# Altium PCB care.PcbDoc
Units mm, origin at the board's own origin, x right, y up, seen from the top; angles counter-clockwise.
Board outline 40 x 35 mm, 2 copper layers (Top Layer, Bottom Layer); 39 components, 34 nets, 158 pads, 53 vias.
Unrouted connection lines stored in the file: 1.
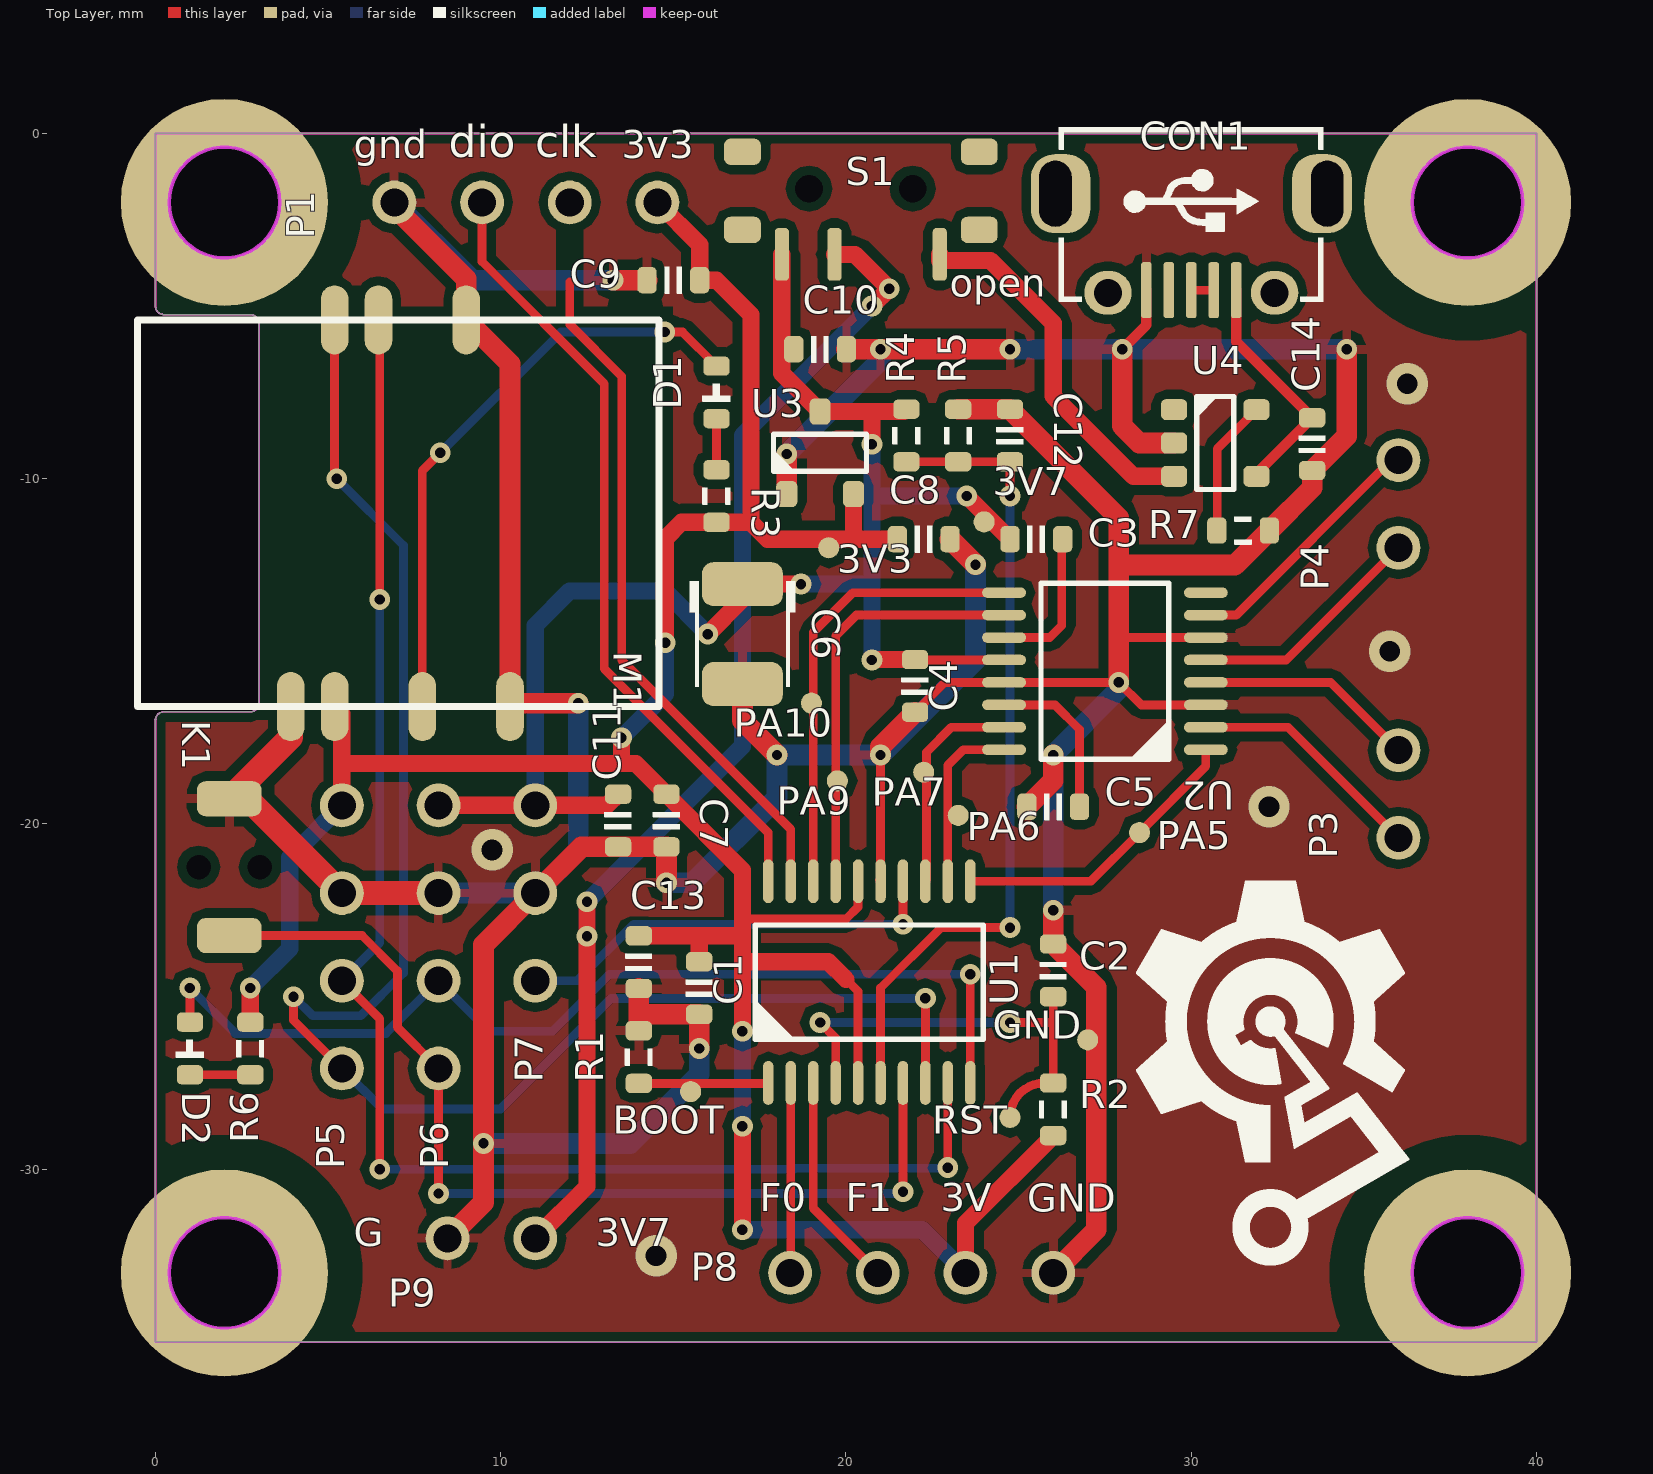
[diagram p0: Top Layer view]
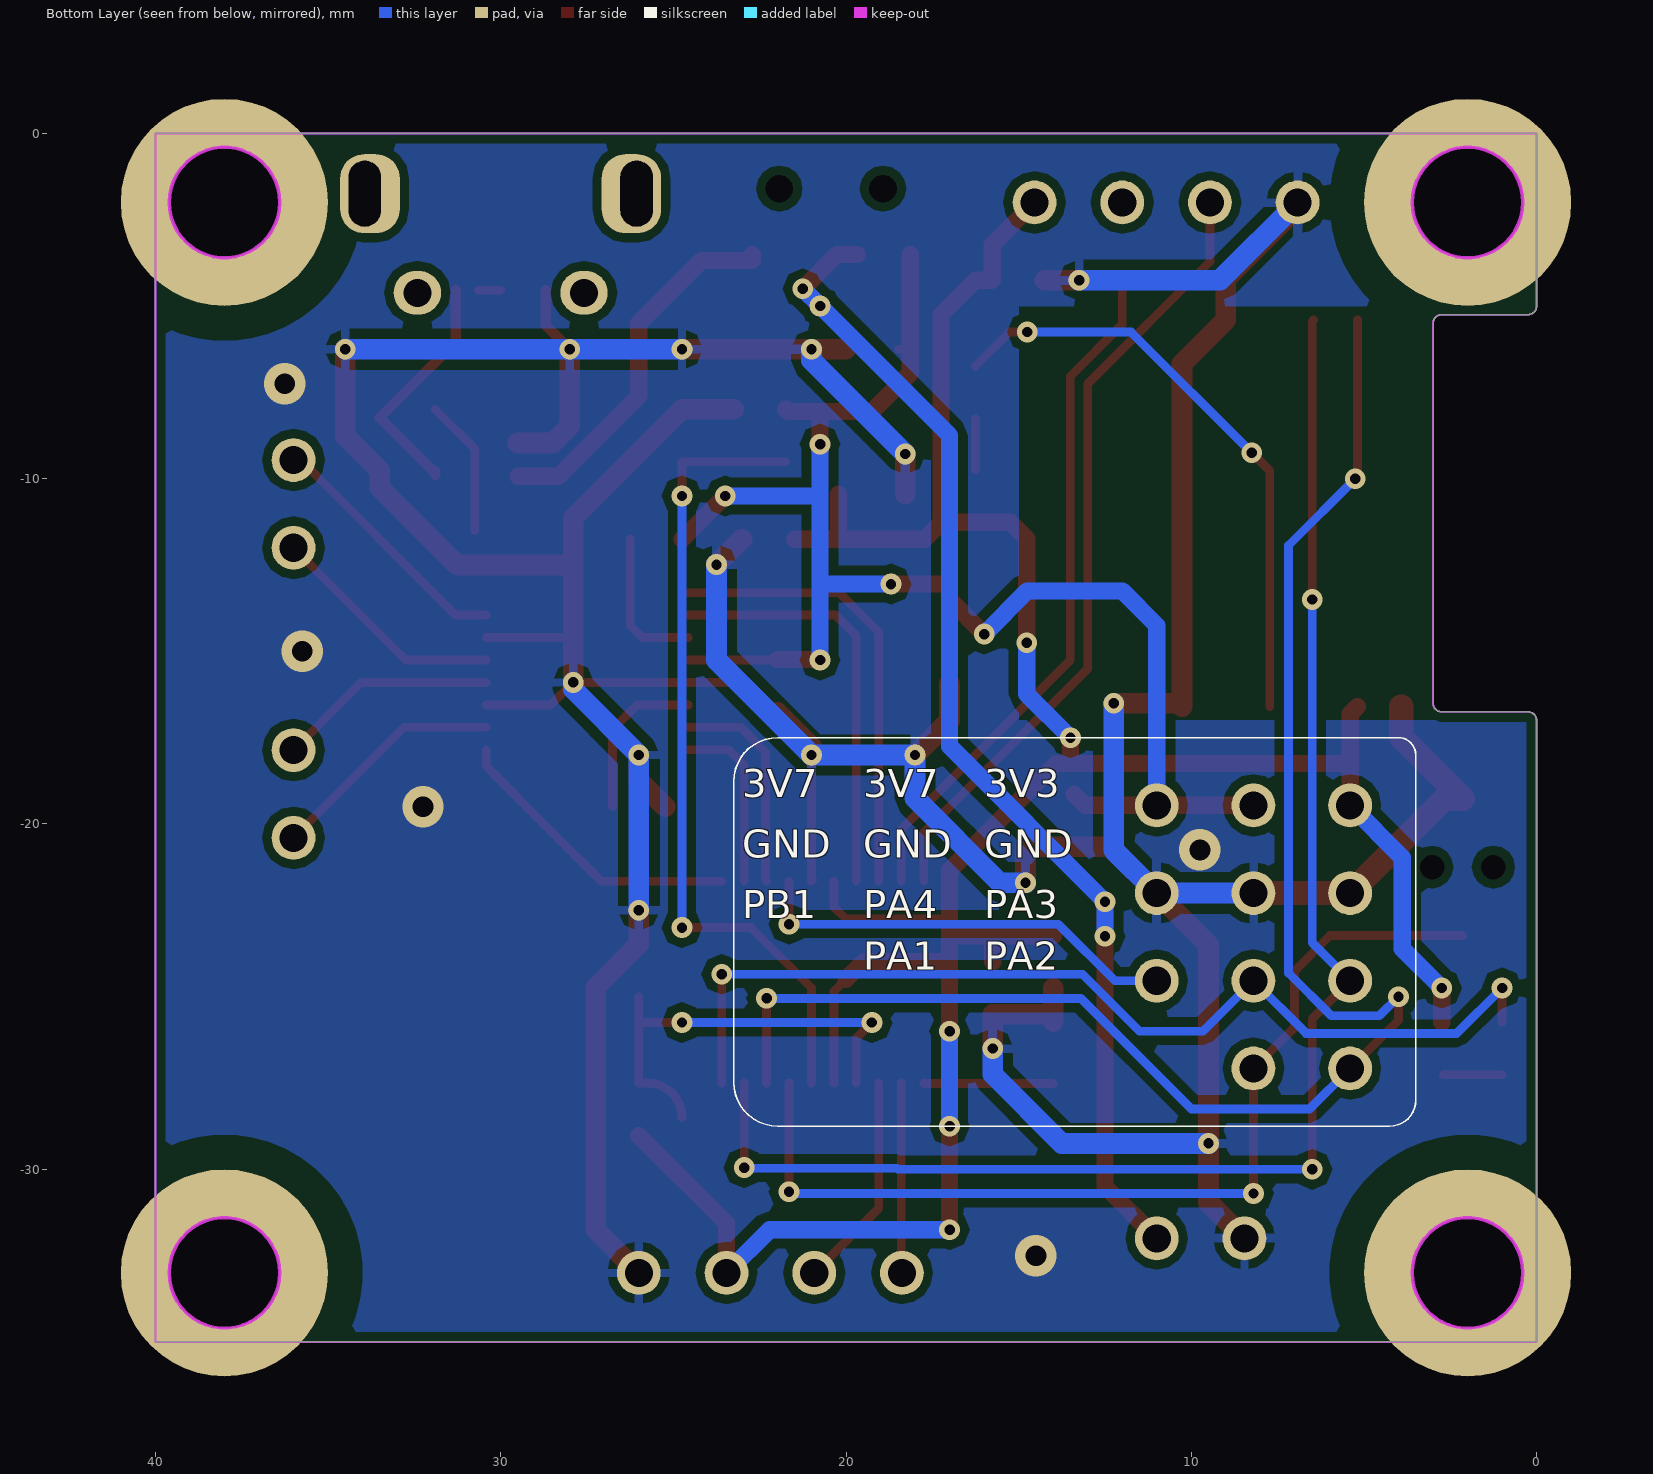
[diagram p1: Bottom Layer view, seen from below]
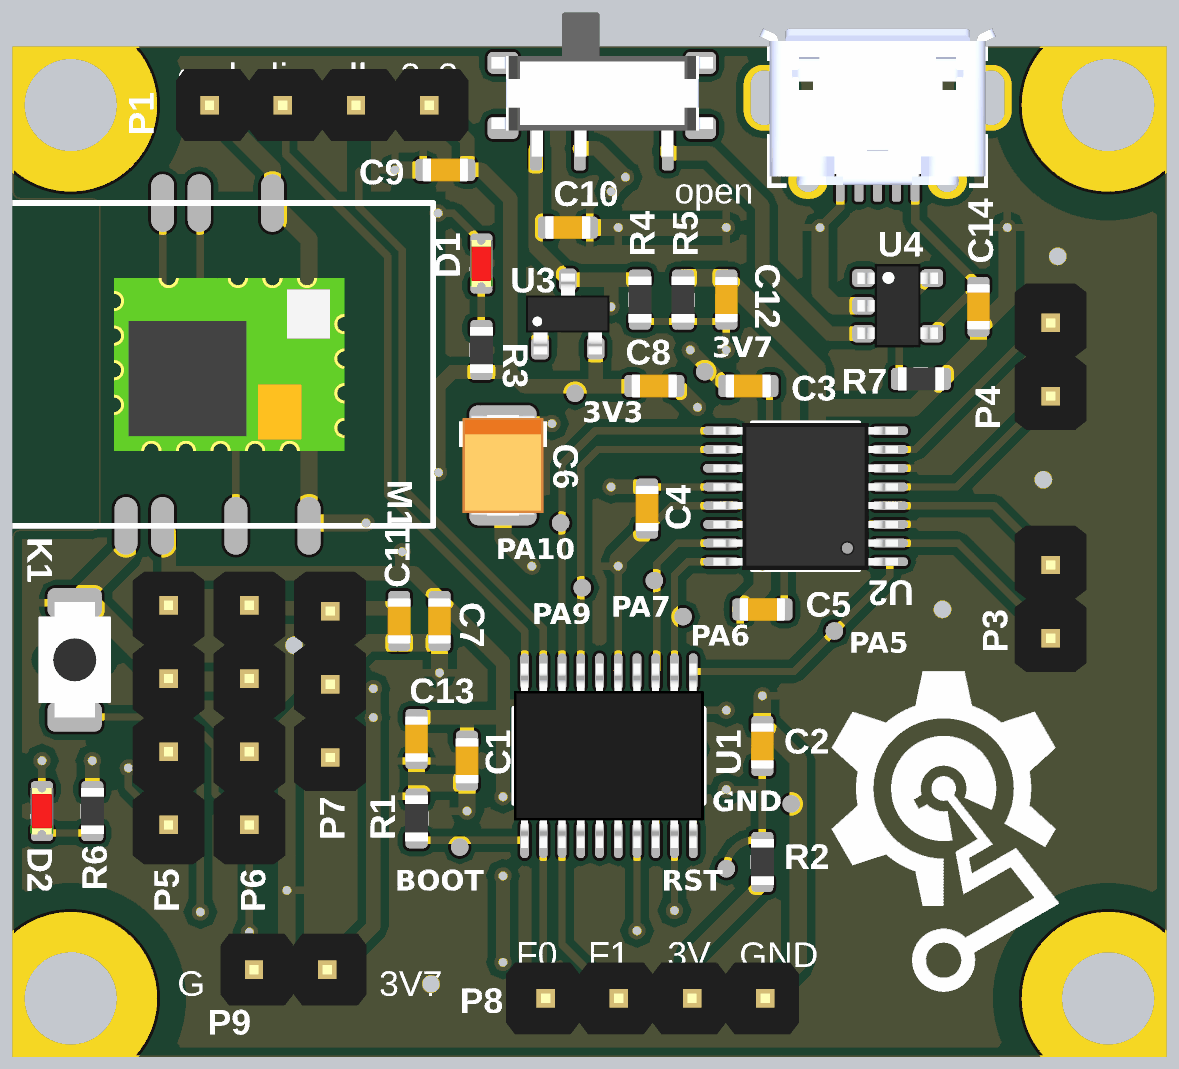
[diagram p2: 3D render of the assembled board from above, using the file's embedded part models]

## Layer stack, top to bottom
Top Solder: solder mask 0.0102, Solder Resist, Dk 3.5
Top Layer: signal copper 0.0356
Dielectric 1: dielectric 0.32, FR-4, Dk 4.8
Bottom Layer: signal copper 0.0356
Bottom Solder: solder mask 0.0102, Solder Resist, Dk 3.5

## Board outline
0,0 40,0 40,-35 0,-35 0,-17.125 0,-17 0,-17.125 0,-17 cw(c0.25,-17) 0.25,-16.75 2.75,-16.75 ccw(c2.75,-16.5) 3,-16.5 3,-5.5 ccw(c2.75,-5.5) 2.75,-5.25 0.25,-5.25 cw(c0.25,-5) 0,-5 0,0
cut-out: 3.6,-2 ccw(c2,-2) 2,-0.4 ccw(c2,-2) 0.4,-2 ccw(c2,-2) 2,-3.6 ccw(c2,-2)
cut-out: 39.6,-2 ccw(c38,-2) 38,-0.4 ccw(c38,-2) 36.4,-2 ccw(c38,-2) 38,-3.6 ccw(c38,-2)
cut-out: 39.6,-33 ccw(c38,-33) 38,-31.4 ccw(c38,-33) 36.4,-33 ccw(c38,-33) 38,-34.6 ccw(c38,-33)
cut-out: 3.6,-33 ccw(c2,-33) 2,-31.4 ccw(c2,-33) 0.4,-33 ccw(c2,-33) 2,-34.6 ccw(c2,-33)

## Design rules (kind name [scope] priority, off if disabled: settings)
Clearance [All] p1: gap=0.254
PolygonConnect [All] p1: connectstyle=Relief reliefconductorwidth=0.254 reliefentries=4 polygonreliefangle="90 Angle" airgapwidth=0.254
RoutingVias [All] p1: holewidth=0.3 width=1.27 viastyle="Through Hole" minholewidth=0.3 minwidth=0.6 maxholewidth=0.3 maxwidth=1.27
SolderMaskExpansion [All] p1: expansion=0.102
Width [All] p1: maxlimit=1 minlimit=0.254 preferedwidth=0.254 minimp=50.000000 maximp=50.000000 favimp=50.000000
30 further rules are at their usual default settings.

## Components (designator, comment, footprint, x,y, rotation, side; value= is the part's Value field where it differs from the comment)
C1 "104" CAP_0603 15.75,-24.75 r270 top
C2 "104" CAP_0603 26,-24.238 r90 top
C3 "103" CAP_0603 25.512,-11.75 r0 top
C4 "104" CAP_0603 22,-16 r270 top
C5 "225" CAP_0603 26,-19.5 r180 top
C6 "100UP" CAP_TAN_B1210 17,-14.5 r270 top
C7 "105" CAP_0603 14.8,-19.9 r270 top
C8 "104" CAP_0603 22.25,-11.75 r180 top
C9 "105" CAP_0603 15,-4.25 r0 top
C10 "104" CAP_0603 19.25,-6.25 r180 top
C11 "104" CAP_0603 13.4,-19.9 r90 top
C12 "104" CAP_0603 24.75,-8.75 r270 top
C13 "104" CAP_0603 14,-24 r270 top
C14 "105" CAP_0603 33.5,-9 r90 top
CON1 "MicroUSB" USB_Micro-AB 30,-2 r0 top locked
D1 "Blue" LED_0603_RED 16.25,-7.5 r90 top
D2 "Blue" LED_0603_RED 1,-26.5 r90 top
K1 "ButtonTACT" ButtonTACT_3x4x2_180H 2.139,-21.25 r270 top locked
M1 "RF-BM-S02" RF-BM-S02 9,-11 r180 top locked
P1 "HDR1x4_1.27" HDR1X4_2.54_180 6.92,-2 r90 top locked
P3 "DIP 1x2" HDR1X2_2.54_180 36,-20.4 r180 top locked
P4 "DIP 1x2" HDR1X2_2.54_180 36,-12 r180 top locked
P5 "HDR1x4_2.54" HDR1x4_2.54_180 5.4,-19.46 r0 top locked
P6 "HDR1x4_2.54" HDR1x4_2.54_180 8.2,-19.46 r0 top locked
P7 "HDR1x3_2.54" HDR1X3_2.54_180 11,-19.46 r0 top
P8 "HDR1x4_2.54" HDR1x4_2.54_180 26,-33 r270 top
P9 "DIP 1x2" HDR1X2_2.54_180 8.46,-32 r90 top locked
R1 "10k" RES_0603 14,-26.75 r90 top
R2 "10k" RES_0603 26,-28.262 r90 top
R3 "1k" RES_0603 16.25,-10.5 r90 top
R4 "10k" RES_0603 21.75,-8.75 r270 top
R5 "10k" RES_0603 23.25,-8.75 r90 top
R6 "470" RES_0603 2.75,-26.5 r270 top
R7 "2K" RES_0603 31.5,-11.5 r0 top
S1 "SPDT 3P" SwitchSPDT_2.8X6.6_90 20.429,-1.6 r180 top
U1 "STM32F03xF" TSSOP_E170_P0.65_20 20.675,-24.579 r90 top locked
U2 "DRV8833PWP" TSSOP_E170_P0.65_16 27.5,-15.575 r180 top
U3 "6" SOT23-3 19.25,-9.25 r90 top
U4 "TP4054" SOT23-5 30.694,-8.965 r0 top

## Footprints (in the part's own frame and the unit in brackets; to place one, negate y for a bottom-side part, rotate by r counter-clockwise, add the part's x,y. Pads: shape width x height; smd on the part's side, far side on the other; paste and mask are expansions set on the pad)
ButtonTACT_3x4x2_180H [mil]
  round 0 hole 28: 0(0,35) 0(0,-35)
  rrect50% 40x74 smd: 1(-78,0) 2(78,0)
  body extent -79,-49 79,49, height 63
CAP_0603 [mil]
  rrect50% 22x30 smd: 1(-30,0) 2(30,0)
  silkscreen extent -10,-15 10,15, body extent -31,-16 31,16, height 31
CAP_TAN_B1210 [mil]
  rrect50% 50x92 smd: 1(-57,0) 2(57,0)
  silkscreen extent -60,-60 60,60, body extent -69,-55 69,55, height 83
HDR1X2_2.54_180 [mil]
  round 50 hole 32: 1(0,0) 2(0,-100)
  body extent -49,-150 49,50, height 323
HDR1X3_2.54_180 [mil]
  round 50 hole 32: 1(0,0) 2(0,-100) 3(0,-200)
  body extent -49,-250 49,50, height 323
HDR1X4_2.54_180 [mil]
  round 50 hole 32: 1(0,0) 2(0,-100) 3(0,-200) 4(0,-300)
  body extent -49,-350 49,50, height 323
HDR1x4_2.54_180 [mil]
  round 50 hole 32: 1(0,0) 2(0,-100) 3(0,-200) 4(0,-300)
  body extent -49,-350 49,50, height 323
LED_0603_RED [mil]
  rrect50% 22x30 smd: 1(-30,0) 2(30,0)
  silkscreen extent -10,-16 10,16, body extent -32,-16 32,16, height 24
RES_0603 [mil]
  rrect50% 22x30 smd: 1(-30,0) 2(30,0)
  silkscreen extent -10,-16 10,16, body extent -31,-16 31,16, height 18
RF-BM-S02 [mm]
  oval 0.8x2 smd: 1(5.08,5.6) 2(3.81,5.6) 4(1.27,5.6) 6(-1.27,5.6) 14(0,-5.6) 16(2.54,-5.6) 17(3.81,-5.6)
  silkscreen extent -5.58,-5.6 9.52,5.6, body extent -2.5,-3 5.5,3, height 1.6
SOT23-3 [mil]
  rrect50% 30x24 smd: 1(-47,38) 2(-47,-38) 3(47,0)
  silkscreen extent -21,-53 21,53, body extent -55,-57 55,57, height 51
SOT23-5 [mil]
  rrect50% 30x24 smd: 1(-47,38) 2(-47,0) 3(-47,-38) 4(47,-38) 5(47,38)
  silkscreen extent -21,-53 21,53, body extent -55,-57 55,57, height 57
SwitchSPDT_2.8X6.6_90 [mil]
  rrect50% 42x30 smd: 0(-135,-42) 0(-135,47) 0(135,-42) 0(135,47)
  round 10 hole 31.5: 0(-59.06,0) 0(59.06,0)
  rrect50% 16x60 smd: 1(90,75) 2(30,75) 3(-90,75)
  body extent -152,-111 151,86, height 55
TSSOP_E170_P0.65_16 [mil]
  oval 50x12 smd: 1(-115,89.57) 2(-115,63.98) 3(-115,38.39) 4(-115,12.8) 5(-115,-12.8) 6(-115,-38.39) 7(-115,-63.98) 8(-115,-89.57) 9(115,-89.57) 10(115,-63.98) 11(115,-38.39) 12(115,-12.8) 13(115,12.8) 14(115,38.39) 15(115,63.98) 16(115,89.57)
  silkscreen extent -73,-100 73,101, body extent -126,-100 126,100, height 47
TSSOP_E170_P0.65_20 [mil]
  oval 50x12 smd: 1(-115,115.16) 2(-115,89.57) 3(-115,63.98) 4(-115,38.39) 5(-115,12.8) 6(-115,-12.8) 7(-115,-38.39) 8(-115,-63.98) 9(-115,-89.57) 10(-115,-115.16) 11(115,-115.16) 12(115,-89.57) 13(115,-63.98) 14(115,-38.39) 15(115,-12.8) 16(115,12.8) 17(115,38.39) 18(115,63.98) 19(115,89.57) 20(115,115.16)
  silkscreen extent -65,-130 65,130, body extent -126,-130 126,130, height 42
USB_Micro-AB [mil]
  rrect80% 68x90 hole 37 slot 75 at 90 deg copper offset 6,0 mask+0: 0(-155,10)
  oval 54x50 hole 32 mask+0: 0(-95,-103) 0(95,-103)
  rrect80% 68x90 hole 37 slot 75 at 90 deg copper offset -6,0 mask+0: 0(155,10)
  rrect50% 12x64 smd: 1(51.18,-100) 2(25.59,-100) 3(0,-100) 4(-25.59,-100) 5(-51.18,-100)
  silkscreen extent -151,-112 150,86, body extent -161,-109 161,104, height 108

## Part data
C1 C2 C3 C4 C5 C6 C7 C8 C9 C10 C11 C12 C13 C14: library part Cap_0603, "Capacitor"
CON1: library part USB_Micro, "USB"
D1 D2: library part LED_0603, "LED"
K1: library part ButtonTACT_3x4x2_180, "Button"
M1: "Module"
P1 P5 P6 P7 P8: "Header"
P3 P4 P9: library part HDR1x2_2.54, "Header"
R1 R2 R3 R4 R5 R6 R7: library part Res_0603, "Resistor"
S1: library part SwitchSPDT_2.8x6.6_90, "Switch"
U1: "MCU"
U2: "Touch"
U3: library part ME6206A33M3G, "SOT-23-3L"
U4: "Power"

## Free pads (board coordinates)
  round 0.61 smd: 0(15.5,-27.75) 0(19,-16.5) 0(19.5,-12) 0(19.75,-18.75) 0(22.25,-18.5) 0(23.25,-19.75) 0(24,-11.25) 0(24.75,-28.5) 0(27,-26.25) 0(28.5,-20.25)
  round 6 hole 3.2: 1(2,-33) 1(2,-2) 1(38,-33) 1(38,-2)

## Via types
v1: diameter 0.6, hole 0.3, Top Layer to Bottom Layer, tented both sides, 48 vias
v2: diameter 1.2, hole 0.6, Top Layer to Bottom Layer, tented both sides, 5 vias

## Nets (pads, with @x,y where several pads share a name; then routed paths per layer and width w, separated by ;. In a path a pad name is that pad's centre, name@x,y a point inside that pad or via, vN(x,y) a via of type N, cw(c..) or ccw(c..) an arc to the next point about the centre after c; other vN are vias at no path point)
3.7: C3.1 C4.1 C6.1 C10.2 C11.2 P6.1 P7.1 pad.0@24,-11.25 R4.1 S1.1 U2.12 U3.3 | length 45.5
  Top Layer w0.254: 18.143,-6.25 C10.2 ; C4.1 22.012,-15.25 U2.12
  Top Layer w0.5: P6.1 P7.1 13.078,-19.46 C11.2 ; v1(16,-14.5) 17,-13.5 C6.1 v1(18.698,-13.052) ; S1.1 18.143,-6.25 18.143,-6.949 U3.3 20.75,-8.056 ; v1(20.75,-15.25) 20.762,-15.238 C4.1 ; v1(20.75,-9) 20.75,-8.056 ; R4.1 21.682,-8.056 20.75,-8.056 ; v1(23.5,-10.5) C3.1
  Bottom Layer w0.5: P7.1 11,-14.25 12,-13.25 14.75,-13.25 v1(16,-14.5) ; v1(18.698,-13.052) 20.698,-13.052 20.75,-13 ; v1(20.75,-15.25) 20.75,-13 ; v1(20.75,-9) 20.75,-10.5 ; v1(23.5,-10.5) 20.75,-10.5 ; 20.75,-13 20.75,-10.5
3V3: C1.1 C7.1 C8.2 C9.2 C13.1 M1.2 P1.4 P5.1 P8.2 pad.0@19.5,-12 R2.1 R3.1 R6.1 U1.5 U1.16 U3.2 | length 86.2
  Top Layer w0.254: 17,-22.75 20,-22.75 20.35,-22.4 U1.16 ; 20,-24.5 20.35,-24.85 U1.5
  Top Layer w0.5: R6.1 v1(2.75,-24.75) ; M1.2 5.4,-16.81 5.4,-18.25 ; P5.1 5.4,-18.25 ; v1(13.5,-17.5) 13.5,-18.25 ; C13.1 15.75,-23.238 ; P1.4 15.762,-3.222 C9.2 16.25,-4.25 17.25,-5.25 17.25,-11.25 17.238,-11.262 ; v1(14.762,-14.75) 14.762,-11.738 15.238,-11.262 R3.1 17.238,-11.262 ; C1.1 15.75,-23.238 ; v1(17,-31.75) v1(17,-28.75) ; v1(17,-26) 17,-23.988 ; 20,-24.5 19.488,-23.988 17,-23.988 ; U3.2 20.215,-11.715 20.25,-11.75 ; C8.2 20.25,-11.75 ; P8.2 23.46,-31.564 R2.1 ; 5.4,-18.25 13.5,-18.25 ; 13.5,-18.25 13.912,-18.25 C7.1 17,-21.338 17,-22.75 17,-23.369 ; 15.75,-23.238 16.869,-23.238 17,-23.369 ; 17,-23.988 17,-23.369 ; 17.238,-11.262 17.726,-11.75 20.25,-11.75
  Bottom Layer w0.5: v1(2.75,-24.75) 3.888,-23.612 3.888,-20.972 P5.1 ; v1(13.5,-17.5) 14.762,-16.238 v1(14.762,-14.75) ; v1(17,-31.75) 22.21,-31.75 P8.2 ; v1(17,-28.75) v1(17,-26)
GND: C1.2 C2.2 C4.2 C5.2 C6.2 C7.2 C8.1 C9.1 C10.1 C11.1 C12.1 C13.2 C14.1 CON1.5 K1.1 M1.1 M1.6 M1.14 P1.1 P5.2 P6.2 P7.2 P8.1 P9.1 pad.0@27,-26.25 R1.2 R5.2 R7.2 U1.15 U2.3 U2.6 U2.13 U3.1 U4.2 | length 177.7
  Top Layer w0.254: U1.15@20.969,-21.627 U1.15 v1(21,-18) ; C4.2 22.862,-15.9 U2.13 v1(27.9,-15.9) 28.55,-16.55 U2.3 ; 27.9,-14.75 28.05,-14.6 U2.6
  Top Layer w0.3: v1(28,-6.25) 28.7,-5.55 CON1.5
  Top Layer w0.6: P1.1 6.92,-2.133 9,-4.213 M1.14 10.27,-6.67 M1.6 10.37,-16.5 v1(12.25,-16.5) ; P9.1 9.5,-30.96 v1(9.5,-29.25) 9.5,-23.5 P7.2 12.338,-20.662 C11.1 C7.2 v1(14.8,-21.7) ; v1(13.25,-4.25) C9.1 ; R1.2@14,-25.726 14,-25.238 ; C13.2 14,-25.238 ; v1(15.75,-26.5) C1.2 14.012,-25.512 14,-25.238 ; C6.2 17,-17 v1(18,-18) ; U3.1 v1(18.285,-9.285) ; C10.1 v1(21,-6.25) v1(24.75,-6.25) ; v1(21,-18) 21,-17.762 C4.2 ; C8.1 v1(23.75,-12.488) ; R5.2 C12.1 27.9,-11.138 27.9,-12.5 ; C5.2 26,-18.738 v1(26,-18) ; P8.1 27.25,-31.75 27.25,-24.726 C2.2 v1(26,-22.5) ; v1(27.9,-15.9) 27.9,-14.75 27.9,-12.5 ; v1(28,-6.25) 28,-8.471 28.495,-8.965 U4.2 ; v1(34.5,-6.25) 34.5,-8.762 C14.1 33.5,-10.262 R7.2 31.262,-12.5 27.9,-12.5
  Top Layer w0.7: M1.1 3.92,-17.488 K1.1 2.669,-19.269 P5.2 P6.2
  Bottom Layer w0.6: P1.1 9.17,-4.25 v1(13.25,-4.25) ; P6.2 P7.2 12.25,-20.75 v1(12.25,-16.5) ; v1(9.5,-29.25) 13.75,-29.25 15.75,-27.25 v1(15.75,-26.5) ; v1(14.8,-21.7) 15.55,-21.7 18,-19.25 v1(18,-18) v1(21,-18) 23.75,-15.25 v1(23.75,-12.488) ; v1(18.285,-9.285) 21,-6.57 v1(21,-6.25) ; v1(24.75,-6.25) v1(28,-6.25) v1(34.5,-6.25) ; v1(26,-22.5) v1(26,-18) 27.9,-16.1 v1(27.9,-15.9)
  other v2: 14.5,-32.5 9.75,-20.75 32.25,-19.5 35.75,-15 36.25,-7.25
NetC2_1: C2.1 pad.0@24.75,-28.5 R2.2 U1.4 | length 13
  Top Layer w0.254: v1(19.25,-25.75) 19.7,-26.2 U1.4 ; pad.0@24.75,-28.5 cw(c25.75,-28.5) 25.75,-27.5 R2.2 26,-25.75 ; v1(24.75,-25.75) 26,-25.75 ; C2.1 26,-25.75
  Bottom Layer w0.254: v1(19.25,-25.75) v1(24.75,-25.75)
NetC3_2: C3.2 U2.11 | length 4.3
  Top Layer w0.254: U2.11 25.9,-14.6 26.25,-14.25 C3.2@26.25,-11.75
NetC5_1: C5.1 U2.14 | length 4.7
  Top Layer w0.254: U2.14 26.05,-16.55 26.762,-17.262 C5.1
NetC14_2: C14.2 CON1.1 U4.4 | length 7.1
  Top Layer w0.254: U4.4 31.888,-9.85 U4.4@31.888,-9.757
  Top Layer w0.3: CON1.1 31.3,-6.038 33.453,-8.191 C14.2 U4.4@31.888,-9.85
NetCON1_2: CON1.2 CON1.3 | length 0.6
  Top Layer w0.254: CON1.3 CON1.2
NetD1_1: D1.1 R3.2 | length 1.5
  Top Layer w0.254: R3.2 D1.1
NetD1_2: D1.2 M1.4 | length 17.4
  Top Layer w0.254: M1.4 7.73,-9.77 v1(8.25,-9.25) ; v1(14.75,-5.75) 15.262,-5.75 D1.2
  Bottom Layer w0.254: v1(8.25,-9.25) 11.75,-5.75 v1(14.75,-5.75)
NetD2_1: D2.1 R6.2 | length 1.7
  Top Layer w0.254: D2.1 R6.2@2.7,-27.262
NetP3_1: P3.1 U2.2 | length 6.9
  Top Layer w0.254: U2.2 32.8,-17.2 P3.1
NetP3_2: P3.2 U2.4 | length 6.4
  Top Layer w0.254: U2.4 34.04,-15.9 P3.2
NetP4_1: P4.1 U2.5 | length 6.9
  Top Layer w0.254: U2.5 32.75,-15.25 P4.1
NetP4_2: P4.2 U2.7 | length 7.4
  Top Layer w0.254: U2.7 31.3,-13.95 35.79,-9.46 P4.2
NetR1_1: pad.0@15.5,-27.75 R1.1 U1.1 | length 3.8
  Top Layer w0.254: R1.1 17.738,-27.512 U1.1
NetR7_1: R7.1 U4.5 | length 4
  Top Layer w0.254: R7.1@30.75,-11.5 30.75,-9.138 U4.5
PA0: C12.2 R4.2 R5.1 U1.6 | length 23.7
  Top Layer w0.254: U1.6 21,-24.75 22.75,-23 v1(24.75,-23) ; R4.2 R5.1 C12.2 v1(24.75,-10.5)
  Bottom Layer w0.254: v1(24.75,-23) v1(24.75,-10.5)
PA1: K1.2 P6.4 U1.7 | length 29
  Top Layer w0.254: K1.2 5.981,-23.231 7.008,-24.258 7.008,-25.888 P6.4 v1(8.2,-30.7) ; v1(21.65,-30.65) U1.7
  Bottom Layer w0.254: v1(8.2,-30.7) v1@21.7,-30.7 ; v1(21.65,-30.65) v1@21.7,-30.7 ; v1@21.75,-30.75 v1@21.7,-30.7
PA2: M1.17 P5.4 U1.8 | length 47.5
  Top Layer w0.254: v1(4,-25) 4,-25.68 P5.4 ; v1@5.19,-10 M1.17 ; U1.8 v1(22.3,-25.05)
  Bottom Layer w0.254: v1(4,-25) 4.556,-25.556 5.944,-25.556 7.184,-24.316 7.184,-11.934 v1(5.25,-10) ; P5.4 6.57,-28.25 10,-28.25 13.2,-25.05 v1(22.3,-25.05)
PA3: M1.16 P5.3 U1.9 | length 44.5
  Top Layer w0.254: P5.3 6.5,-25.64 v1(6.5,-30) ; M1.16 6.5,-5.44 v1(6.5,-13.5) ; v1(22.95,-29.95) U1.9
  Bottom Layer w0.254: P5.3 6.5,-23.44 v1(6.5,-13.5) ; v1(6.5,-30) 18.5,-30 18.531,-29.969 22.969,-29.969 v1(22.95,-29.95)
PA4: D2.2 P6.3 U1.10 | length 29.2
  Top Layer w0.254: D2.2 v1(1,-24.75) ; U1.10 v1(23.6,-24.35)
  Bottom Layer w0.254: v1(1,-24.75) 2.314,-26.064 6.676,-26.064 P6.3 9.66,-26 11.5,-26 13.15,-24.35 v1(23.6,-24.35)
PA5: pad.0@28.5,-20.25 U1.11 U2.1 | length 8.7
  Top Layer w0.254: U1.11 27.092,-21.658 28.5,-20.25 30.421,-18.329 U2.1
PA6: pad.0@23.25,-19.75 U1.12 U2.16 | length 5.2
  Top Layer w0.254: U1.12 22.95,-18.3 23.4,-17.85 U2.16
PA7: pad.0@22.25,-18.5 U1.13 U2.15 | length 6.3
  Top Layer w0.254: U1.13 22.331,-21.627 22.331,-17.919 23.05,-17.2 U2.15
PA9: pad.0@19.75,-18.75 U1.17 U2.10 | length 12.2
  Top Layer w0.254: U1.17 19.7,-14.55 20.3,-13.95 U2.10
PA10: pad.0@19,-16.5 U1.18 U2.9 | length 13.2
  Top Layer w0.254: U1.18 19.05,-14.45 20.2,-13.3 U2.9
PA13: P1.3 U1.19 | length 20
  Top Layer w0.254: 12,-4.3 12,-5.532 13.508,-7.04 13.508,-15.258 18.4,-20.15 U1.19
PA14: P1.2 U1.20 | length 23.1
  Top Layer w0.254: P1.2 9.46,-3.71 13,-7.25 13,-15.5 17.75,-20.25 U1.20
PB1: P7.3 U1.14 | length 12.6
  Top Layer w0.254: v1(21.65,-22.9) U1.14
  Bottom Layer w0.254: P7.3 12.21,-24.54 13.85,-22.9 v1(21.65,-22.9)
PF0: P8.4 U1.2 | length 5.6
  Top Layer w0.254: P8.4 18.4,-32.98 U1.2
  Bottom Layer w0.254: P8.4@18.369,-32.909 P8.4@18.4,-32.94
PF1: P8.3 U1.3 | length 6.3
  Top Layer w0.254: U1.3 19.05,-31.13 P8.3
VBAT: P9.2 S1.2 | length 35.4
  Top Layer w0.5: P9.2 12.5,-30.5 v1(12.5,-23.25) v1(12.5,-22.25) ; S1.2 20.255,-3.505 v1(21.25,-4.5) v1(20.75,-5)
  Bottom Layer w0.5: v1(12.5,-23.25) v1(12.5,-22.25) 17,-17.75 17,-8.75 v1(20.75,-5) v1(21.25,-4.5)
VIN: S1.3 U4.3 | length 10.8
  Top Layer w0.5: S1.3 22.715,-3.679 24.179,-3.679 26,-5.5 26,-7.608 28.323,-9.93 U4.3
pads on no net: CON1.0 CON1.4 K1.0 S1.0 U2.8 U4.1

## Polygon pours and split planes (outlines as drawn)
GND on Top Layer "Top Layer-No Net" (solid, pour order 10): 0,0 40,0 40,-35 0,-35 0,-17 cw(c0.25,-17) 0.25,-16.75 2.75,-16.75 ccw(c2.75,-16.5) 3,-16.5 3,-5.5 ccw(c2.75,-5.5) 2.75,-5.25 0.25,-5.25 cw(c0.25,-5) 0,-5 0,0
GND on Bottom Layer "Top Layer-No Net" (solid, pour order 12): 0,0 40,0 40,-35 0,-35 0,-17 cw(c0.25,-17) 0.25,-16.75 2.75,-16.75 ccw(c2.75,-16.5) 3,-16.5 3,-5.5 ccw(c2.75,-5.5) 2.75,-5.25 0.25,-5.25 cw(c0.25,-5) 0,-5 0,0

## Keep-outs
Keep-Out Layer:
  circle w0.1: c2,-2 r1.6
  circle w0.1: c38,-2 r1.6
  circle w0.1: c38,-33 r1.6
  circle w0.1: c2,-33 r1.6
  lines w0.05: 0,-3.75 0,-5 ; 3,-15 3,-7 ; 0,-5 ccw(c0.25,-5) 0.25,-5.25 2.75,-5.25 cw(c2.75,-5.5) 3,-5.5 3,-16.5 cw(c2.75,-16.5) 2.75,-16.75 0.25,-16.75 ccw(c0.25,-17) 0,-17 0,-17.25 0,-35 40,-35 40,0 23.25,0 17.75,0 17,0 0,0 0,-5

## Other copper
Top Layer:
  pour cut-out: -1,-5 15,-5 15,-17 -1,-17
  pour cut-out: 6,-2 ccw(c2,-2) 2,2 ccw(c2,-2) -2,-2 ccw(c2,-2) 2,-6 ccw(c2,-2)
  pour cut-out: 42,-2 ccw(c38,-2) 38,2 ccw(c38,-2) 34,-2 ccw(c38,-2) 38,-6 ccw(c38,-2)
  pour cut-out: 42,-33 ccw(c38,-33) 38,-29 ccw(c38,-33) 34,-33 ccw(c38,-33) 38,-37 ccw(c38,-33)
  pour cut-out: 6,-33 ccw(c2,-33) 2,-29 ccw(c2,-33) -2,-33 ccw(c2,-33) 2,-37 ccw(c2,-33)
Bottom Layer:
  pour cut-out: -1,-17 -1,-5 15,-5 15,-17
  pour cut-out: 6,-2 ccw(c2,-2) 2,2 ccw(c2,-2) -2,-2 ccw(c2,-2) 2,-6 ccw(c2,-2)
  pour cut-out: 42,-2 ccw(c38,-2) 38,2 ccw(c38,-2) 34,-2 ccw(c38,-2) 38,-6 ccw(c38,-2)
  pour cut-out: 42,-33 ccw(c38,-33) 38,-29 ccw(c38,-33) 34,-33 ccw(c38,-33) 38,-37 ccw(c38,-33)
  pour cut-out: 6,-33 ccw(c2,-33) 2,-29 ccw(c2,-33) -2,-33 ccw(c2,-33) 2,-37 ccw(c2,-33)
Multi-Layer:
  lines w0.05: 23.25,0 40,0 40,-35 0,-35 0,-17 cw(c0.25,-17) 0.25,-16.75 2.75,-16.75 ccw(c2.75,-16.5) 3,-16.5 3,-5.5 ccw(c2.75,-5.5) 2.75,-5.25 0.25,-5.25 cw(c0.25,-5) 0,-5 0,0 17.75,0 23.5,0

## Silkscreen, mask and mechanical layers (free items; w line width, h text height)
Top Overlay:
  drawing of 12404 lines, arcs and shapes, not listed
  text "gnd" at 5.75,-1 h1.4
  text "dio" at 8.5,-1 h1.6
  text "clk" at 11,-1 h1.6
  text "3v3" at 13.5,-1 h1.4
  text "open" at 23,-5 h1.4
  text "3V7" at 24.25,-10.75 h1.4
  text "3V3" at 19.75,-13 h1.4
  text "PA10" at 16.75,-17.75 h1.4
  text "PA7" at 20.75,-19.75 h1.4
  text "PA9" at 18,-20 h1.4
  text "PA6" at 23.5,-20.75 h1.4
  text "PA5" at 29,-21 h1.4
  text "GND" at 24.25,-26.5 h1.4
  text "BOOT" at 13.25,-29.25 h1.4
  text "RST" at 22.5,-29.25 h1.4
  text "F0" at 17.5,-31.488 h1.4
  text "F1" at 20,-31.488 h1.4
  text "3V" at 22.75,-31.488 h1.4
  text "GND" at 25.25,-31.5 h1.4
  text "G" at 5.75,-32.5 h1.4
  text "3V7" at 12.75,-32.5 h1.4
Bottom Overlay:
  lines w0.05: 5,-17.5 21.98,-17.5 cw(c21.98,-18.77) 23.25,-18.77 23.25,-27.48 cw(c21.98,-27.48) 21.98,-28.75 4.25,-28.75 cw(c4.25,-28) 3.5,-28 3.5,-18 cw(c4,-18) 4,-17.5 5.25,-17.5
  text "3V3" at 16,-19.5 h1.4
  text "3V7" at 19.5,-19.5 h1.4
  text "3V7" at 23,-19.5 h1.4
  text "GND" at 16,-21.25 h1.4
  text "GND" at 19.5,-21.25 h1.4
  text "GND" at 23,-21.25 h1.4
  text "PA3" at 16,-23 h1.4
  text "PA4" at 19.5,-23 h1.4
  text "PB1" at 23,-23 h1.4
  text "PA2" at 16,-24.5 h1.4
  text "PA1" at 19.5,-24.5 h1.4
Top Paste:
  lines w0.05: -6.5,-27.25 cw(c-6.25,-27.25) -6.25,-27